# Altium PCB LCD_Controller.PcbDoc
Units mm, origin at the board's own origin, x right, y up, seen from the top; angles counter-clockwise.
Board outline 172.5 x 79.9 mm, 2 copper layers (Top Layer, Bottom Layer); 89 components, 123 nets, 382 pads, 379 vias.
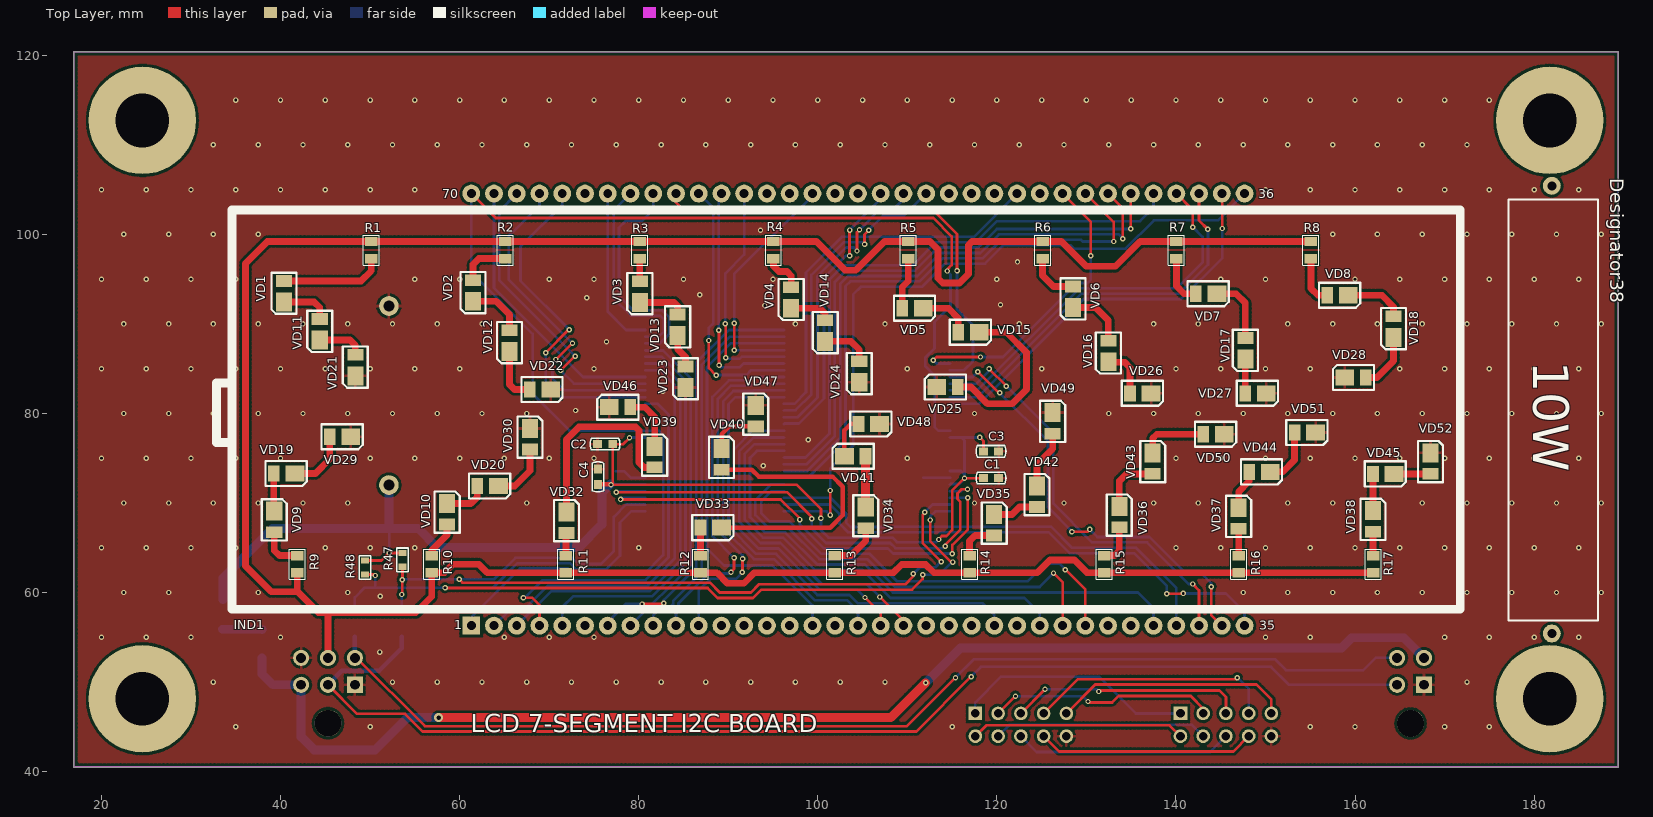
[diagram p0: Top Layer view]
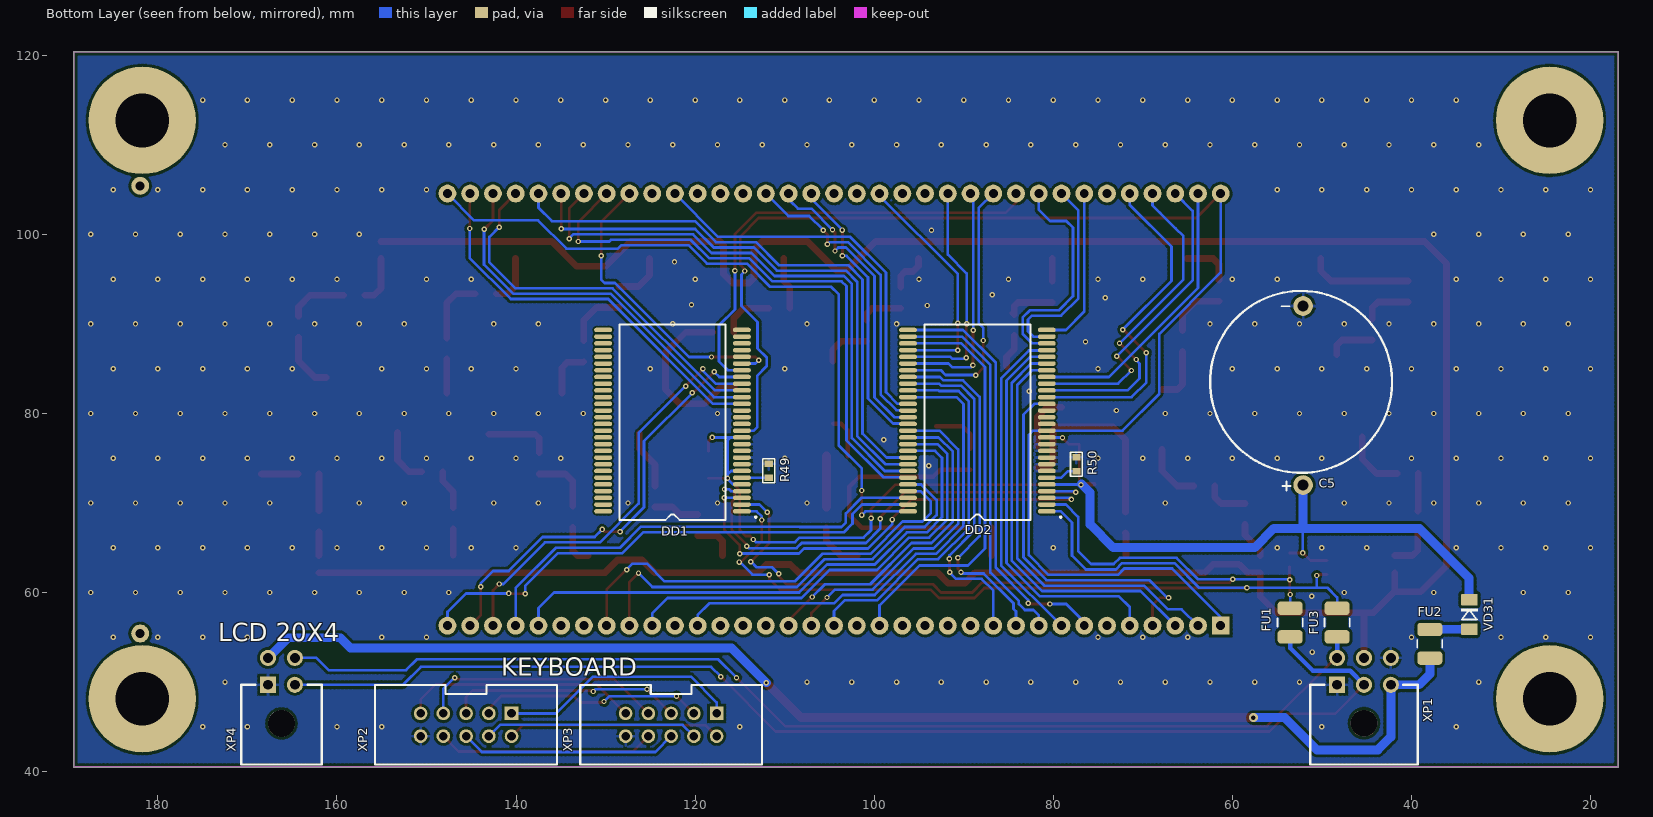
[diagram p1: Bottom Layer view, seen from below]

## Layer stack, top to bottom
Top Solder: solder mask 0.0102, Solder Resist, Dk 3.5
Top Layer: signal copper 0.0356
Dielectric 1: dielectric 0.32, FR-4, Dk 4.8
Bottom Layer: signal copper 0.0356
Bottom Solder: solder mask 0.0102, Solder Resist, Dk 3.5

## Board outline
16.9,40.5 189.4,40.5 189.4,120.4 16.9,120.4

## Design rules (kind name [scope] priority, off if disabled: settings)
Clearance Clearance_1 [InComponent('DD1') OR InComponent('DD2')] p1: gap=0.2
Clearance [All] p2: gap=0.3
PolygonConnect PolygonConnect_1 [IsVia OR InComponent('VT1')] p1: connectstyle=Direct reliefconductorwidth=0.254 reliefentries=4 polygonreliefangle="90 Angle" airgapwidth=0.254
PolygonConnect [All] p2: connectstyle=Relief reliefconductorwidth=0.3 reliefentries=4 polygonreliefangle="90 Angle" airgapwidth=0.3
RoutingVias [All] p1: holewidth=0.4 width=0.8 viastyle="Through Hole" minholewidth=0.3 minwidth=0.6 maxholewidth=0.5 maxwidth=1
SolderMaskExpansion [All] p1: expansion=0.102
Width [All] p1: maxlimit=5 minlimit=0.2 preferedwidth=0.5
30 further rules are at their usual default settings.

## Classes and differential pairs
component class Main: C1 C2 C3 C4 C5 DD1 DD2 FU1 FU2 FU3 R47 R48 R49 R50 VD31 XP1 XP2 XP3 XP4
component class LED_backlight: R1 R2 R3 R4 R5 R6 R7 R8 R9 R10 R11 R12 R13 R14 R15 R16 R17 VD1 VD2 VD3 VD4 VD5 VD6 VD7 VD8 VD9 VD10 VD11 VD12 VD13 VD14 VD15 VD16 VD17 VD18 VD19 VD20 VD21 VD22 VD23 VD24 VD25 VD26 VD27 VD28 VD29 VD30 VD32 VD33 VD34 VD35 VD36 VD37 VD38 VD39 VD40 VD41 VD42 VD43 VD44 VD45 VD46 VD47 VD48 VD49 VD50 VD51 VD52
component class LCD: IND1

## Components (designator, comment, footprint, x,y, rotation, side; value= is the part's Value field where it differs from the comment)
C1 "0.1uF" CC0603 119.35,72.775 r0 top
C2 "0.1uF" CC0603 76.25,76.575 r180 top
C3 "0.1uF" CC0603 119.35,75.775 r0 top
C4 "0.1uF" CC0603 75.45,72.925 r90 top
C5 "EEC-S5R5H105" CR2032_ONBOARD 52.45,83.425 r0 bottom
DD1 "PCF8576" SOT190-1 114.775,69.075 r0 bottom
DD2 "PCF8576" SOT190-1 80.725,69.075 r0 bottom
Designator38 "Comment" R_5W_Cement 181.975,105.425 r270 top
FU1 "MICROSMD010F-2" RC1210 53.55,56.65 r90 bottom
FU2 "MICROSMD010F-2" RC1210 37.95,54.275 r90 bottom
FU3 "MICROSMD010F-2" RC1210 48.3,56.65 r90 bottom
IND1 "DE156" IND_DE156 61.3,56.3 r90 top
R1 "82E" RC0805 50.125,98.25 r90 top
R2 "82E" RC0805 65.075,98.25 r90 top
R3 "82E" RC0805 80.1,98.25 r90 top
R4 "82E" RC0805 95.05,98.25 r90 top
R5 "82E" RC0805 110.1,98.25 r90 top
R6 "82E" RC0805 125.1,98.25 r90 top
R7 "82E" RC0805 140.05,98.25 r90 top
R8 "82E" RC0805 155.075,98.25 r90 top
R9 "82E" RC0805 41.875,63.175 r270 top
R10 "82E" RC0805 56.875,63.175 r270 top
R11 "82E" RC0805 71.875,63.175 r270 top
R12 "82E" RC0805 86.9,63.175 r270 top
R13 "82E" RC0805 101.9,63.175 r270 top
R14 "82E" RC0805 116.95,63.175 r270 top
R15 "82E" RC0805 131.975,63.175 r270 top
R16 "82E" RC0805 147,63.175 r270 top
R17 "82E" RC0805 162.025,63.175 r270 top
R47 "2k2" RC0603 53.625,63.65 r90 top
R48 "2k2" RC0603 49.425,62.8 r90 top
R49 "0E" RC0603 111.775,73.6 r270 bottom
R50 "0E" RC0603 77.425,74.325 r270 bottom
VD1 "LED_3528" 3528LED 40.375,93.8 r270 top
VD2 "LED_3528" 3528LED 61.5,93.875 r270 top
VD3 "LED_3528" 3528LED 80.125,93.75 r270 top
VD4 "LED_3528" 3528LED 97.025,93.1 r270 top
VD5 "LED_3528" 3528LED 110.425,91.75 r0 top
VD6 "LED_3528" 3528LED 128.5,93.175 r270 top
VD7 "LED_3528" 3528LED 143.225,93.375 r0 top
VD8 "LED_3528" 3528LED 157.9,93.2 r0 top
VD9 "LED_3528" 3528LED 39.3,67.75 r90 top
VD10 "LED_3528" 3528LED 58.6,68.6 r90 top
VD11 "LED_3528" 3528LED 44.375,89.55 r270 top
VD12 "LED_3528" 3528LED 65.575,88.275 r270 top
VD13 "LED_3528" 3528LED 84.35,90.05 r270 top
VD14 "LED_3528" 3528LED 100.825,89.4 r270 top
VD15 "LED_3528" 3528LED 116.675,89.075 r0 top
VD16 "LED_3528" 3528LED 132.45,87.125 r270 top
VD17 "LED_3528" 3528LED 147.75,87.425 r270 top
VD18 "LED_3528" 3528LED 164.3,89.85 r270 top
VD19 "LED_3528" 3528LED 40.25,73.3 r0 top
VD20 "LED_3528" 3528LED 62.975,71.9 r0 top
VD21 "LED_3528" 3528LED 48.35,85.55 r270 top
VD22 "LED_3528" 3528LED 68.825,82.675 r0 top
VD23 "LED_3528" 3528LED 85.225,84.25 r270 top
VD24 "LED_3528" 3528LED 104.625,84.825 r270 top
VD25 "LED_3528" 3528LED 114.625,82.95 r180 top
VD26 "LED_3528" 3528LED 135.875,82.25 r0 top
VD27 "LED_3528" 3528LED 148.725,82.25 r0 top
VD28 "LED_3528" 3528LED 160.2,84.025 r180 top
VD29 "LED_3528" 3528LED 46.5,77.4 r0 top
VD30 "LED_3528" 3528LED 67.85,76.975 r90 top
VD31 "LL4148" SOD-80 33.525,57.55 r270 bottom
VD32 "LED_3528" 3528LED 71.925,67.65 r90 top
VD33 "LED_3528" 3528LED 87.9,67.25 r0 top
VD34 "LED_3528" 3528LED 105.35,68.2 r90 top
VD35 "LED_3528" 3528LED 119.7,67.375 r90 top
VD36 "LED_3528" 3528LED 133.675,68.275 r90 top
VD37 "LED_3528" 3528LED 147,68.125 r90 top
VD38 "LED_3528" 3528LED 162,67.8 r90 top
VD39 "LED_3528" 3528LED 81.775,74.975 r90 top
VD40 "LED_3528" 3528LED 89.25,74.725 r90 top
VD41 "LED_3528" 3528LED 104.325,75.225 r180 top
VD42 "LED_3528" 3528LED 124.475,70.55 r90 top
VD43 "LED_3528" 3528LED 137.4,74.25 r90 top
VD44 "LED_3528" 3528LED 149.175,73.475 r0 top
VD45 "LED_3528" 3528LED 163,73.25 r0 top
VD46 "LED_3528" 3528LED 78.05,80.7 r180 top
VD47 "LED_3528" 3528LED 93.075,79.55 r90 top
VD48 "LED_3528" 3528LED 105.55,78.825 r0 top
VD49 "LED_3528" 3528LED 126.225,78.75 r90 top
VD50 "LED_3528" 3528LED 144.05,77.675 r0 top
VD51 "LED_3528" 3528LED 154.25,77.875 r0 top
VD52 "LED_3528" 3528LED 168.425,74.25 r90 top
XP1 "MIF2X03PRP" MIF2X03PRP 48.3,49.7 r270 bottom
XP2 "n.p" BH-10 140.5,46.5 r0 bottom
XP3 "n.p" BH-10 117.6,46.5 r0 bottom
XP4 "n.p" MIF2X02PRP 167.7,49.7 r270 bottom

## Footprints (in the part's own frame and the unit in brackets; to place one, negate y for a bottom-side part, rotate by r counter-clockwise, add the part's x,y. Pads: shape width x height; smd on the part's side, far side on the other; paste and mask are expansions set on the pad)
3528LED [mm]
  rect 1.3x1.8 smd: 1(-1,0)
  rect 2.1x1.8 smd: 2(1.35,0)
  silkscreen extent -1.92,-1.4 2.68,1.4
BH-10 [mil]
  rect 60x60 hole 38: 1(0,0)
  round 60 hole 38: 2(0,100) 3(100,0) 4(100,100) 5(200,0) 6(200,100) 7(300,0) 8(300,100) 9(400,0) 10(400,100)
  silkscreen extent -200,-125 600,225
CC0603 [mm]
  rect 1x0.9 smd paste-25.4: 1(-0.85,0) 2(0.85,0)
  silkscreen extent -1.66,-0.65 1.66,0.65
CR2032_ONBOARD [mm]
  round 2.2 hole 1.2: 1(-0.35,-8.575) 2(-0.35,11.425)
  silkscreen extent -10.28,-10.26 10.03,12.02
IND_DE156 [mm]
  rect 2x2 hole 1: 1(0,0)
  round 2 hole 1: 2(0,-2.54) 3(0,-5.08) 4(0,-7.62) 5(0,-10.16) 6(0,-12.7) 7(0,-15.24) 8(0,-17.78) 9(0,-20.32) 10(0,-22.86) 11(0,-25.4) 12(0,-27.94) 13(0,-30.48) 14(0,-33.02) 15(0,-35.56) 16(0,-38.1) 17(0,-40.64) 18(0,-43.18) 19(0,-45.72) 20(0,-48.26) 21(0,-50.8) 22(0,-53.34) 23(0,-55.88) 24(0,-58.42) 25(0,-60.96) 26(0,-63.5) 27(0,-66.04) 28(0,-68.58) 29(0,-71.12) 30(0,-73.66) 31(0,-76.2) 32(0,-78.74) 33(0,-81.28) 34(0,-83.82) 35(0,-86.36) 36(48.26,-86.36) 37(48.26,-83.82) 38(48.26,-81.28) 39(48.26,-78.74) 40(48.26,-76.2) 41(48.26,-73.66) 42(48.26,-71.12) 43(48.26,-68.58) 44(48.26,-66.04) 45(48.26,-63.5) 46(48.26,-60.96) 47(48.26,-58.42) 48(48.26,-55.88) 49(48.26,-53.34) 50(48.26,-50.8) 51(48.26,-48.26) 52(48.26,-45.72) 53(48.26,-43.18) 54(48.26,-40.64) 55(48.26,-38.1) 56(48.26,-35.56) 57(48.26,-33.02) 58(48.26,-30.48) 59(48.26,-27.94) 60(48.26,-25.4) 61(48.26,-22.86) 62(48.26,-20.32) 63(48.26,-17.78) 64(48.26,-15.24) 65(48.26,-12.7) 66(48.26,-10.16) 67(48.26,-7.62) 68(48.26,-5.08) 69(48.26,-2.54) 70(48.26,0)
  silkscreen extent 1.84,-110.45 46.42,28.45
MIF2X02PRP [mm]
  rect 1.8x1.8 hole 1.1: 1(0,0)
  round 1.8 hole 1.1: 2(0,3) 3(-3,0) 4(-3,3)
  round 3 hole 3 unplated: 5(4.32,1.5)
  silkscreen extent 0,-3 8.9,6
MIF2X03PRP [mm]
  rect 1.8x1.8 hole 1.1: 1(0,0)
  round 1.8 hole 1.1: 2(0,3) 3(0,6) 4(-3,0) 5(-3,3) 6(-3,6)
  round 3 hole 3 unplated: 7(4.3,3)
  silkscreen extent 0,-3 8.9,9
R_5W_Cement [mm]
  round 2 hole 1: 1(0,0) 2(50,0)
  silkscreen extent 1.53,-4.85 48.55,5.15
RC0603 [mm]
  rect 0.7x0.9 smd paste-25.4: 1(-0.775,0) 2(0.774,0)
  silkscreen extent -1.32,-0.65 1.33,0.65
RC0805 [mm]
  rect 1.05x1.4 smd paste-25.4: 1(-0.95,0) 2(0.95,0)
  silkscreen extent -1.67,-0.89 1.67,0.89
RC1210 [mm]
  rrect50% 1.5x2.8 smd: 1(-1.6,0) 2(1.6,0)
  silkscreen extent -0.45,-1.4 0.45,1.4
SOD-80 [mm]
  rrect10% 1.3x1.83 smd paste-25.4: 1(1.651,0) 2(-1.651,0)
  silkscreen extent -0.66,-0.91 0.56,0.91
SOT190-1 [mm]
  oval 2x0.5 smd: 1(0,0) 2(0,-0.75) 3(0,-1.5) 4(0,-2.25) 5(0,-3) 6(0,-3.75) 7(0,-4.5) 8(0,-5.25) 9(0,-6) 10(0,-6.75) 11(0,-7.5) 12(0,-8.25) 13(0,-9) 14(0,-9.75) 15(0,-10.5) 16(0,-11.25) 17(0,-12) 18(0,-12.75) 19(0,-13.5) 20(0,-14.25) 21(0,-15) 22(0,-15.75) 23(0,-16.5) 24(0,-17.25) 25(0,-18) 26(0,-18.75) 27(0,-19.5) 28(0,-20.25) 29(15.5,-20.25) 30(15.5,-19.5) 31(15.5,-18.75) 32(15.5,-18) 33(15.5,-17.25) 34(15.5,-16.5) 35(15.5,-15.75) 36(15.5,-15) 37(15.5,-14.25) 38(15.5,-13.5) 39(15.5,-12.75) 40(15.5,-12) 41(15.5,-11.25) 42(15.5,-10.5) 43(15.5,-9.75) 44(15.5,-9) 45(15.5,-8.25) 46(15.5,-7.5) 47(15.5,-6.75) 48(15.5,-6) 49(15.5,-5.25) 50(15.5,-4.5) 51(15.5,-3.75) 52(15.5,-3) 53(15.5,-2.25) 54(15.5,-1.5) 55(15.5,-0.75) 56(15.5,0)
  silkscreen extent -1.64,-20.85 13.66,0.97

## Part data
C1 C2 C3 C4: library part CC0603, "CC0603"
C5: library part CR2032-VBY2
DD1 DD2: "LCD Controller"
FU1 FU2 FU3: library part MICROSMD, "MICROSMD"
IND1: library part IND7_DE156, "6digit 7Segment indicator"
R1 R2 R3 R4 R5 R6 R7 R8 R9 R10 R11 R12 R13 R14 R15 R16 R17: library part RC0805, "RC0805"
R47 R48 R49 R50: library part RC0603, "RC0603"
VD1 VD2 VD3 VD4 VD5 VD6 VD7 VD8 VD9 VD10 VD11 VD12 VD13 VD14 VD15 VD16 VD17 VD18 VD19 VD20 VD21 VD22 VD23 VD24 VD25 VD26 VD27 VD28 VD29 VD30 VD32 VD33 VD34 VD35 VD36 VD37 VD38 VD39 VD40 VD41 VD42 VD43 VD44 VD45 VD46 VD47 VD48 VD49 VD50 VD51 VD52: library part 3528LED
XP2 XP3: library part BH-10, "BH-10"
XP4: library part MIF2X02PRP, "MIF2X02PRP"

## Free pads (board coordinates)
  round 12 hole 6 unplated: 0(24.565,48.135) 0(24.565,112.725) 0(181.75,48.135) 0(181.75,112.725)

## Via types
v1: diameter 0.6, hole 0.3, Top Layer to Bottom Layer, 378 vias
v2: diameter 1, hole 0.5, Top Layer to Bottom Layer, 1 vias

## Nets (pads, with @x,y where several pads share a name; then routed paths per layer and width w, separated by ;. In a path a pad name is that pad's centre, name@x,y a point inside that pad or via, vN(x,y) a via of type N, cw(c..) or ccw(c..) an arc to the next point about the centre after c; other vN are vias at no path point)
1A: DD2.19 IND1.67 | length 36.9
  Top Layer w0.3: v1(70.75,86.025) 72.55,87.825 v1(72.6,87.825)
  Bottom Layer w0.3: IND1.67 68.92,103.245 68.059,102.384 66.336,100.661 65.475,99.8 65.475,94.95 v1(72.6,87.825) ; v1(70.75,86.025) 70.75,85.95 70.375,85.575 70.375,83.925 71.725,82.575 DD2.19
1B: DD2.18 IND1.66 | length 38.2
  Top Layer w0.3: v1(69.6,86.775) 72.175,89.35 v1(72.25,89.35)
  Bottom Layer w0.3: v1(69.6,86.775) 69.6,83.475 71.25,81.825 DD2.18 ; IND1.66 71.46,103.285 66.8,98.625 66.8,94.8 v1(72.25,89.35)
1C: DD2.17 IND1.4 | length 41.5
  Top Layer w0.3: v1(67.125,59.425) 68.1,59.425 68.92,58.605 IND1.4
  Bottom Layer w0.3: v1(67.125,59.425) 67.325,59.425 69.283,61.383 80.769,61.383 83.325,63.939 83.325,79.875 82.125,81.075 DD2.17
1D: DD2.23 IND1.3 | length 45.9
  Bottom Layer w0.3: IND1.3 70.255,60.175 81.258,60.175 84.625,63.542 84.625,83.428 82.478,85.575 DD2.23
1E: DD2.22 IND1.2 | length 46.7
  Bottom Layer w0.3: IND1.2 65.665,58.125 67.2,58.125 69.85,60.775 81.009,60.775 84.025,63.791 84.025,83.179 82.379,84.825 DD2.22
1F: DD2.20 IND1.68 | length 34.9
  Top Layer w0.3: v1(71.275,84.8) 72.85,86.375 v1(72.925,86.375)
  Bottom Layer w0.3: IND1.68 64.44,102.62 64.44,94.86 v1(72.925,86.375) ; v1(71.275,84.8) 72.75,83.325 DD2.20
1G: DD2.21 IND1.69 | length 31.5
  Bottom Layer w0.3: IND1.69 63.84,94.035 73.8,84.075 DD2.21
2A: DD2.27 IND1.63 | length 22.7
  Bottom Layer w0.3: IND1.63 77.2,102.68 77.2,92.85 79.125,90.925 82.375,90.925 82.825,90.475 82.825,89.175 82.225,88.575 DD2.27
2B: DD2.26 IND1.62 | length 25.7
  Bottom Layer w0.3: DD2.26 82.35,87.825 83.425,88.9 83.425,90.724 82.624,91.525 79.374,91.525 77.8,93.099 77.8,100.75 78.55,101.5 80.375,101.5 81.62,102.745 IND1.62
2C: DD2.25 IND1.8 | length 36.8
  Bottom Layer w0.3: IND1.8 85.825,63.045 85.825,83.925 82.725,87.025 80.775,87.025 DD2.25
2D: DD2.29 IND1.7 | length 47.2
  Top Layer w0.3: v1(80.375,58.725) 82.725,58.725 v1(82.8,58.8)
  Bottom Layer w0.3: IND1.7 76.54,56.715 78.55,58.725 v1(80.375,58.725) ; v1(82.8,58.8) 82.8,59.171 86.425,62.796 86.425,85.675 90.075,89.325 DD2.29
2E: IND1.6
2F: DD2.28 IND1.64 | length 18.2
  Bottom Layer w0.3: IND1.64 76.54,91.385 78.6,89.325 DD2.28
2G: IND1.65
3A: DD2.33 IND1.58 | length 25.9
  Top Layer w0.3: v1(89.679,90.029) 89.729,89.979 v1(89.729,86.204)
  Bottom Layer w0.3: v1(89.679,90.029) 89.679,95.629 91.78,97.73 IND1.58 ; v1(89.729,86.204) 89.809,86.125 91.3,86.125 91.5,86.325 DD2.33
3B: DD2.32 IND1.55 | length 26.7
  Top Layer w0.3: v1(90.654,87.054) v1(90.654,90.079)
  Bottom Layer w0.3: v1(90.654,87.054) 90.675,87.075 DD2.32 ; v1(90.654,90.079) 90.654,95.554 99.4,104.3 IND1.55
3C: DD2.31 IND1.16 | length 46.6
  Bottom Layer w0.3: DD2.31 90.272,87.825 87.625,85.178 87.625,64.925 89.525,63.025 94.95,63.025 99.4,58.575 IND1.16
3D: DD2.37 IND1.11 | length 38.3
  Top Layer w0.3: v1(91.575,62.25) 91.6,62.275 v1(91.6,63.775)
  Bottom Layer w0.3: IND1.11 86.7,60.203 88.022,61.525 90.85,61.525 v1(91.575,62.25) ; v1(91.6,63.775) 91.6,64.15 88.825,66.925 88.825,81.601 90.324,83.1 92.522,83.1 92.747,83.325 DD2.37
3E: DD2.36 IND1.10 | length 39.6
  Top Layer w0.3: v1(90.3,62.275) 90.65,62.625 v1(90.65,63.875)
  Bottom Layer w0.3: IND1.10 84.16,57.896 84.45,58.186 84.45,58.801 87.774,62.125 90.15,62.125 v1(90.3,62.275) ; v1(90.65,63.875) 88.225,66.3 88.225,81.85 90.075,83.7 92.274,83.7 92.649,84.075 DD2.36
3F: DD2.34 IND1.59 | length 26.9
  Top Layer w0.3: v1(88.954,89.304) 88.975,89.284 v1(88.975,85.375)
  Bottom Layer w0.3: v1(88.954,89.304) 88.929,89.329 88.929,104.249 IND1.59 ; v1(88.975,85.375) 89.2,85.15 91.275,85.15 91.7,85.575 DD2.34
3G: DD2.35 IND1.60 | length 29.3
  Top Layer w0.3: v1(87.829,88.154) 87.829,85.071 v1(88.65,84.25)
  Bottom Layer w0.3: IND1.60 88.329,102.931 88.329,90.075 87.829,89.575 v1(87.829,88.154) ; v1(88.65,84.25) 88.7,84.3 92.025,84.3 92.55,84.825 DD2.35
4A: DD2.41 IND1.50 | length 34.6
  Top Layer w0.3: v1(105.225,98.9) 105.225,99.975 105.686,100.436 v1(105.686,100.475)
  Bottom Layer w0.3: DD2.41 96.275,80.375 97.524,80.375 99.275,82.126 99.275,95.476 102.924,99.125 105,99.125 v1(105.225,98.9) ; v1(105.686,100.475) 107.261,102.05 109.59,102.05 IND1.50
4B: DD2.40 IND1.46 | length 43.6
  Bottom Layer w0.3: DD2.40 97.375,81.075 98.675,82.375 98.675,95.725 102.675,99.725 117.425,99.725 IND1.46
4C: DD2.39 IND1.24 | length 55.2
  Bottom Layer w0.3: DD2.39 90.8,81.825 90.025,81.05 90.025,67.422 93.122,64.325 95.347,64.325 99.947,59.725 103.549,59.725 104.474,58.8 118.42,58.8 119.72,57.5 IND1.24
4D: DD2.45 IND1.20 | length 36.9
  Top Layer w0.3: v1(106.925,59.5) 109.56,56.865 IND1.20
  Bottom Layer w0.3: DD2.45 92.824,77.325 91.225,75.726 91.225,67.919 93.619,65.525 95.844,65.525 100.444,60.925 105.5,60.925 v1(106.925,59.5)
4E: DD2.44 IND1.19 | length 36.7
  Top Layer w0.3: v1(105.275,59.45) 107.02,57.705 IND1.19
  Bottom Layer w0.3: DD2.44 92.725,78.075 90.625,75.975 90.625,67.671 93.371,64.925 95.596,64.925 100.196,60.325 104.4,60.325 v1(105.275,59.45)
4F: DD2.42 IND1.51 | length 32.9
  Top Layer w0.3: v1(104.375,98.15) 104.375,100.225 v1(104.655,100.505)
  Bottom Layer w0.3: DD2.42 97.75,79.575 99.975,81.8 99.975,95.328 103.172,98.525 104,98.525 v1(104.375,98.15) ; v1(104.655,100.505) 107.025,102.875 108.525,102.875 109.405,103.755 IND1.51@109.405,104.025
4G: DD2.43 IND1.52 | length 31.7
  Top Layer w0.3: v1(103.55,97.625) 103.55,100.475 v1(103.555,100.48)
  Bottom Layer w0.3: DD2.43 96.275,78.875 97.899,78.875 100.7,81.676 100.7,95.204 103.096,97.6 103.525,97.6 v1(103.55,97.625) ; v1(103.555,100.48) 107.02,103.945 IND1.52 IND1.52@107.205,104.375
5A: DD2.49 IND1.41 | length 63.6
  Top Layer w0.3: v1(134.95,100.625) 134.95,104.55 IND1.41
  Bottom Layer w0.3: DD2.49 98.724,74.325 101.9,77.501 101.9,94.707 103.143,95.95 110.874,95.95 113.449,98.525 117.922,98.525 119.997,100.6 v1@134.875,100.6
5B: DD2.48 IND1.40 | length 64.5
  Bottom Layer w0.3: DD2.48 98.625,75.075 101.3,77.75 101.3,94.956 102.894,96.55 110.625,96.55 113.2,99.125 117.674,99.125 120.024,101.475 136,101.475 137.5,102.975 IND1.40
5C: DD2.47 IND1.31 | length 62
  Bottom Layer w0.3: DD2.47 93.2,75.825 92.425,75.05 92.425,68.416 94.116,66.725 96.341,66.725 99.941,63.125 105.25,63.125 108.375,60 135.75,60 137.5,58.25 IND1.31
5D: DD2.53 IND1.28 | length 49.7
  Top Layer w0.3: v1(127.65,62.55) 129.88,60.32 IND1.28
  Bottom Layer w0.3: DD2.53 94.849,71.325 93.674,70.151 93.674,68.864 94.613,67.925 96.838,67.925 100.438,64.325 105.8,64.325 108.875,61.25 123.4,61.25 125.375,63.225 126.975,63.225 v1(127.65,62.55)
5E: DD2.52 IND1.27 | length 49.2
  Top Layer w0.3: v1(126.325,62.175) 127.34,61.16 IND1.27
  Bottom Layer w0.3: DD2.52 94.75,72.075 93.025,70.35 93.025,68.665 94.365,67.325 96.59,67.325 100.19,63.725 105.525,63.725 108.625,60.625 124.775,60.625 v1(126.325,62.175)
5F: DD2.50 IND1.42 | length 64.7
  Top Layer w0.3: IND1.42 134.05,102.93 v1(134.05,99.525)
  Bottom Layer w0.3: DD2.50 98.822,73.575 102.5,77.253 102.5,94.459 103.391,95.35 111.122,95.35 113.697,97.925 118.171,97.925 120.246,100 133.625,100 v1@134.05,99.575
5G: DD2.51 IND1.43 | length 64.7
  Top Layer w0.3: IND1.43 133.05,101.39 v1(133.05,99.2)
  Bottom Layer w0.3: DD2.51 96.275,72.875 98.971,72.875 103.1,77.004 103.1,94.21 103.64,94.75 111.371,94.75 113.946,97.325 118.419,97.325 120.494,99.4 129.375,99.4 129.575,99.2 v1(133.05,99.2)
6A: DD1.17 IND1.37 | length 44.4
  Top Layer w0.3: IND1.37 145.175,104.505 v1(145.175,100.65)
  Bottom Layer w0.3: DD1.17 118,81.075 129.7,92.775 140.575,92.775 145.175,97.375 v1(145.175,100.65)
6B: DD2.56 IND1.36 | length 79.8
  Top Layer w0.3: v1(101.375,71.4) 101.375,68.675 v1(101.4,68.65)
  Bottom Layer w0.3: DD2.56 100.975,69.075 v1(101.4,68.65) ; v1(101.375,71.4) 101.375,73.85 103.975,76.45 103.975,93.325 104.8,94.15 111.619,94.15 114.194,96.725 118.668,96.725 120.743,98.8 128.225,98.8 128.625,98.4 134.375,98.4 137.55,101.575 144.675,101.575 IND1.36
6C: DD2.55 IND1.35 | length 59.1
  Top Layer w0.3: v1(138.975,59.875) 140.779,59.875 v1(140.807,59.903)
  Bottom Layer w0.3: DD2.55 101.35,69.825 102.425,68.75 102.425,67.7 103.4,66.725 108.59,66.725 108.615,66.75 125.776,66.75 128.126,64.4 135.301,64.4 138.975,60.726 v1(138.975,59.875) ; v1(140.807,59.903) 145.597,59.903 147.66,57.84 IND1.35
6D: DD1.21 IND1.34 | length 49.1
  Top Layer w0.3: v1(117.875,84.65) 120.221,82.304 v1(120.306,82.304) ; v1(128.381,66.778) 130.103,66.778 v1(130.375,67.05) ; v1(143.932,60.653) 143.932,57.488 IND1.34
  Bottom Layer w0.3: DD1.21 117.3,84.075 v1(117.875,84.65) ; v1(120.306,82.304) 125.7,76.91 125.7,69.525 128.447,66.778 v1(128.381,66.778) ; v1(130.375,67.05) 131.225,66.2 137.024,66.2 140.824,62.4 142.575,62.4 143.925,61.05 143.925,60.66 v1(143.932,60.653)
6E: DD1.20 IND1.33 | length 47.4
  Top Layer w0.3: v1(119.131,84.979) v1(121.056,83.054) ; v1(141.875,60.95) 142.58,60.245 IND1.33
  Bottom Layer w0.3: DD1.20 117.704,83.325 119.131,84.751 v1(119.131,84.979) ; v1(121.056,83.054) 126.3,77.81 126.3,69.925 130.625,65.6 136.775,65.6 141.425,60.95 v1(141.875,60.95)
6F: DD1.18 IND1.38 | length 43.3
  Top Layer w0.3: IND1.38 142.58,101.545 v1(143.55,100.575)
  Bottom Layer w0.3: DD1.18 117.901,81.825 129.451,93.375 140.326,93.375 143.576,96.624 143.576,100.549 v1(143.55,100.575)
6G: DD1.19 IND1.39 | length 43
  Top Layer w0.3: IND1.39 141.875,102.725 v1(141.875,100.8)
  Bottom Layer w0.3: DD1.19 117.803,82.575 129.203,93.975 140.078,93.975 142.976,96.873 142.976,99.699 v1(141.875,100.8)
+5V: C1.1 C2.1 C3.1 C4.1 C5.2 DD1.5 DD1.7 DD1.12 DD2.5 DD2.12 R47.2 R48.2 VD31.2 | length 144.4
  Top Layer w0.3: R48.2 51.274,63.574 v1(52.124,64.424) R47.2 ; v1@76.875,72.075 77.1,72.3 C2.1 78.275,76.575 v1@78.95,77.25 ; v1(76.9,72.05) 97.625,72.05 100.35,69.325 v1(100.35,68.3) ; v1(113.5,65.925) 113.5,65.975 113.849,66.324 114.351,66.324 115,66.972 115,71.398 v1(116.381,72.779) C1.1@118.496,72.779 ; v1(118.075,77.325) 118.5,76.9 C3.1
  Top Layer w0.5: C4.1 v1@76.875,72.075
  Bottom Layer w0.3: v1(52.124,64.424) 52.124,67.174 ; v1(76.9,72.05) 76.925,72.075 DD2.5 ; v1(78.975,77.275) 79.025,77.325 DD2.12 ; v1(100.35,68.3) 100.35,66.959 101.184,66.125 108.341,66.125 108.841,65.625 113.2,65.625 v1(113.5,65.925) ; DD1.5 114.825,72.125 115.815,72.125 116.381,72.691 v1(116.381,72.779) 116.381,73.194 ; DD1.7 116,73.575 116.381,73.194 ; DD1.12 116.025,77.325 ; v1(118.075,77.325) 116.025,77.325 ; 116.025,77.325 116.381,76.969 116.381,73.194
  Bottom Layer w1: VD31.2@33.55,59.201 33.55,61.6 39.125,67.175 55.375,67.175 57.525,65.025 73.3,65.025 75.875,67.6 75.875,71.155 v1@76.835,72.115 ; 52.1,67.199 C5.2
BL: R1.2 R2.2 R3.2 R4.2 R5.2 R6.2 R7.2 R8.2 R9.2 R10.2 R11.2 R12.2 R13.2 R14.2 R15.2 R16.2 R17.2 XP1.5 | length 308.8
  Top Layer w0.75: R9.2 41.875,60.1 ; XP1.5 45.3,57.625 45.425,57.75 ; R8.2 R7.2 136,99.2 133.225,96.425 130,96.425 127.225,99.2 R6.2 117.225,99.2 116.825,98.8 116.825,95.575 115.825,94.575 113.95,94.575 113.425,95.1 113.425,98.3 112.525,99.2 R5.2 107.45,99.2 104.25,96 103.05,96 99.85,99.2 R4.2 R3.2 R2.2 R1.2 38.525,99.2 36.075,96.75 36.075,62.975 38.95,60.1 41.875,60.1 ; R17.2 R16.2 R15.2 130.075,62.225 128.675,63.625 125.925,63.625 124.525,62.225 R14.2 112.95,62.225 112.05,63.125 109.375,63.125 108.475,62.225 R13.2 92.929,62.225 91.729,61.025 89.925,61.025 88.725,62.225 R12.2 R11.2 63.075,62.225 62.125,63.175 59.275,63.175 58.325,62.225 R10.2 56.875,59.525 55.1,57.75 45.425,57.75 ; 41.875,60.1 44.225,57.75 45.425,57.75
BP: DD1.13 DD2.13 IND1.1 IND1.70 | length 161.7
  Top Layer w0.3: IND1.70 64.035,101.825 112.901,101.825 114.956,99.771 114.956,96.565 114.456,96.065 v1(114.456,95.905)
  Bottom Layer w0.3: IND1.1 61.3,57.25 66.725,62.675 72.075,62.675 72.767,61.983 80.52,61.983 82.725,64.188 82.725,77.6 82.25,78.075 DD2.13 72.275,78.075 68.15,82.2 68.15,88.876 61.3,95.726 IND1.70 ; v1(114.456,95.905) 114.456,95.894 114.825,95.525 114.825,92 113.025,90.2 113.025,87.275 112,86.25 112,85.275 113.075,84.2 113.075,78.45 113.45,78.075 DD1.13
COL1: DD1.22 IND1.61 | length 51.8
  Top Layer w0.3: IND1.61 84.16,103.565 85.3,102.425 113.15,102.425 115.556,100.019 v1(115.556,95.955)
  Bottom Layer w0.3: DD1.22 116.35,84.825 117.325,85.8 117.325,89.85 115.556,91.619 v1(115.556,95.955)
COL2: DD1.23 IND1.44 | length 34.3
  Top Layer w0.3: v1(112.9,85.925) 113.275,86.3 v1(118.175,86.3) ; IND1.44 130.5,101.4 v1(130.5,97.6)
  Bottom Layer w0.3: v1(112.9,85.925) 113.25,85.575 DD1.23 ; v1(118.175,86.3) 120.679,86.3 128.954,94.575 130.125,94.575 130.5,94.95 v1(130.5,97.6)
DP: DD2.24 IND1.5 | length 43.8
  Bottom Layer w0.3: IND1.5 71.46,58.36 72.675,59.575 81.506,59.575 85.225,63.294 85.225,83.676 82.576,86.325 DD2.24
DP2: DD2.30 IND1.9 | length 42.4
  Bottom Layer w0.3: IND1.9 81.62,57.445 82.225,58.05 83.175,58.05 83.85,58.725 83.85,59.05 87.025,62.225 87.025,85.426 90.174,88.575 DD2.30
DP3: DD2.38 IND1.18 | length 42
  Bottom Layer w0.3: DD2.38 92.846,82.575 92.771,82.5 90.572,82.5 89.425,81.353 89.425,67.174 92.874,63.725 95.099,63.725 99.699,59.125 103.3,59.125 104.48,57.945 IND1.18
DP4: DD2.46 IND1.26 | length 50.9
  Bottom Layer w0.3: DD2.46 92.922,76.575 91.825,75.478 91.825,68.168 93.868,66.125 96.093,66.125 99.696,62.521 102.598,62.521 102.601,62.525 105.001,62.525 108.126,59.4 123.075,59.4 124.8,57.675 IND1.26
DP5: DD2.54 IND1.32 | length 52.8
  Bottom Layer w0.3: DD2.54 101.449,70.575 103.174,68.849 103.174,67.799 103.649,67.325 108.341,67.325 108.366,67.35 126.025,67.35 128.375,65 135.55,65 140.04,60.51 IND1.32
GND: C1.2 C2.2 C3.2 C4.2 C5.1 DD1.8 DD1.9 DD1.10 DD1.11 DD2.7 DD2.8 DD2.9 DD2.10 DD2.11 R49.1 R50.1 VD21.2 VD22.2 VD23.2 VD24.2 VD25.2 VD26.2 VD27.2 VD28.2 VD29.2 VD30.2 VD46.2 VD47.2 VD48.2 VD49.2 VD50.2 VD51.2 VD52.2 XP1.1 XP1.6 XP2.10 XP3.10 XP4.1
  other v1: 35,45 50,45 115,45 155,45 160,45 170,45 175,45 32.5,50 52.5,50 57.5,50 62.5,50 67.5,50 72.5,50 77.5,50 82.5,50 87.5,50 92.5,50 97.5,50 102.5,50 107.5,50 172.5,50 51.075,53.35 20,55 25,55 30,55 40,55 65,55 70,55 75,55 150,55 155,55 170,55 175,55 180,55 185,55 51.125,59.6 22.5,60 27.5,60 37.5,60 47.5,60 147.5,60 152.5,60 157.5,60 162.5,60 167.5,60 172.5,60 177.5,60 182.5,60 187.5,60 20,65 25,65 30,65 35,65 45,65 50,65 55,65 80,65 140,65 145,65 150,65 155,65 160,65 165,65 170,65 175,65 180,65 185,65 22.5,70 27.5,70 32.5,70 37.5,70 42.5,70 47.5,70 67.5,70 107.5,70 117.5,70 127.5,70 137.5,70 142.5,70 152.5,70 157.5,70 167.5,70 172.5,70 177.5,70 182.5,70 187.5,70 93.9,74.15 20,75 25,75 30,75 35,75 40,75 50,75 55,75 60,75 65,75 70,75 75,75 110,75 135,75 140,75 145,75 150,75 155,75 160,75 165,75 170,75 175,75 180,75 185,75 98.95,77.075 22.5,80 27.5,80 32.5,80 37.5,80 42.5,80 47.5,80 52.5,80 57.5,80 62.5,80 67.5,80 117.5,80 132.5,80 137.5,80 142.5,80 147.5,80 152.5,80 157.5,80 162.5,80 167.5,80 172.5,80 177.5,80 182.5,80 187.5,80 72.95,80.325 82.675,82.475 20,85 25,85 30,85 35,85 40,85 45,85 50,85 55,85 60,85 75,85 110,85 125,85 140,85 145,85 150,85 155,85 165,85 170,85 175,85 180,85 185,85 76.4,88.025 22.5,90 27.5,90 32.5,90 37.5,90 42.5,90 47.5,90 52.5,90 57.5,90 62.5,90 97.5,90 107.5,90 122.5,90 137.5,90 142.5,90 152.5,90 157.5,90 162.5,90 167.5,90 172.5,90 177.5,90 182.5,90 187.5,90 94.075,92.05 120.4,92.15 74.2,92.925 86.825,93.275 20,95 25,95 30,95 35,95 55,95 60,95 70,95 75,95 85,95 95,95 120,95 145,95 150,95 160,95 165,95 170,95 175,95 180,95 185,95 122.3,96.925 22.5,100 27.5,100 32.5,100 37.5,100 157.5,100 162.5,100 167.5,100 172.5,100 177.5,100 182.5,100 187.5,100 93.6,100.45 20,105 25,105 30,105 35,105 40,105 45,105 50,105 55,105 150,105 155,105 160,105 165,105 170,105 175,105 180,105 185,105 32.5,110 37.5,110 42.5,110 47.5,110 52.5,110 57.5,110 62.5,110 67.5,110 72.5,110 77.5,110 82.5,110 87.5,110 92.5,110 97.5,110 102.5,110 107.5,110 112.5,110 117.5,110 122.5,110 127.5,110 132.5,110 137.5,110 142.5,110 147.5,110 152.5,110 157.5,110 162.5,110 167.5,110 172.5,110 35,115 40,115 45,115 50,115 55,115 60,115 65,115 70,115 75,115 80,115 85,115 90,115 95,115 100,115 105,115 110,115 115,115 120,115 125,115 130,115 135,115 140,115 145,115 150,115 155,115 160,115 165,115 170,115 175,115
NetDD1_1: DD1.1 DD2.1 FU3.2 R48.1 | length 110.8
  Top Layer w0.3: R48.1 50.45,62.025 v1(50.575,61.9) ; v1(58.375,60.525) 58.4,60.5 87.701,60.5 88.801,59.4 92.774,59.4 93.699,60.325 110.525,60.325 111.705,61.505 v1(111.705,62.003) ; v1(112.555,68.103) 112.55,68.098 112.55,65.739 114.886,63.403 v1(115.081,63.403)
  Bottom Layer w0.3: FU3.2 48.3,59.45 49.387,60.537 50.575,60.537 ; v1(50.575,61.9) 50.575,60.537 ; DD2.1 79.15,69.075 77.9,67.825 77.9,64.125 76.358,62.583 73.016,62.583 72.324,63.275 66.476,63.275 63.738,60.537 50.575,60.537 ; v1(111.705,62.003) 113.603,62.003 115.003,63.403 v1(115.081,63.403) ; v1(112.555,68.103) 112.555,68.505 113.125,69.075 DD1.1
NetDD1_2: DD1.2 DD2.2 FU1.2 R47.1 | length 103.7
  Top Layer w0.3: v1(53.55,59.775) 53.575,59.8 v1(53.575,61.425) ; v1@53.625,61.475 R47.1 ; v1(59.95,61.475) 60.325,61.1 87.95,61.1 89.05,60 92.525,60 93.45,60.925 109.775,60.925 110.675,61.825 v1(110.675,62.1) ; v1(111.93,68.953) 111.93,68.855 111.725,68.65 111.725,65.5 v1(113.775,63.45)
  Bottom Layer w0.3: FU1.2 v1(53.55,59.775) ; v1(53.575,61.425) 53.636,61.486 63.839,61.486 66.228,63.875 72.572,63.875 73.264,63.183 75.775,63.183 77.225,64.633 77.225,68.45 78.6,69.825 DD2.2 ; v1(110.675,62.1) 111.4,62.825 113.15,62.825 v1(113.775,63.45) ; v1(111.93,68.953) 112.802,69.825 DD1.2
NetDD1_3: DD1.3 DD2.3 | length 51.7
  Top Layer w0.3: v1(77.975,70.4) 95.85,70.4 98,68.25 v1(98,68.15) ; v1(115.025,64.325) 115.025,65.3 116.75,67.025 v1(116.75,70.6)
  Bottom Layer w0.3: v1(77.975,70.4) 78.15,70.575 DD2.3 ; v1(98,68.15) 98,67.612 100.687,64.925 107.844,64.925 108.419,64.35 115,64.35 v1(115.025,64.325) ; DD1.3 116.725,70.575 v1(116.75,70.6)
NetDD1_4: DD1.4 DD2.4 | length 53.6
  Top Layer w0.3: v1(77.479,71.203) 96.547,71.203 99.325,68.425 v1(99.325,68.25) ; v1(114.25,65.175) 114.25,65.374 115.926,67.049 115.926,70.124 115.6,70.45 115.6,71.075 116.075,71.55 v1(116.725,71.55)
  Bottom Layer w0.3: v1(77.479,71.203) 77.6,71.325 DD2.4 ; v1(99.325,68.25) 99.325,67.135 100.935,65.525 108.093,65.525 108.668,64.95 114.025,64.95 v1(114.25,65.175) ; DD1.4 116,71.325 116.225,71.55 v1(116.725,71.55)
NetDD1_6: DD1.6 R49.2 | length 3
  Bottom Layer w0.3: R49.2 DD1.6
NetDD2_6: DD2.6 R50.2 | length 3.6
  Bottom Layer w0.3: R50.2 78.374,73.551 79.1,72.825 DD2.6
NetFU1_1: FU1.1 XP1.2 XP4.2 | length 136.6
  Top Layer w0.3: XP1.2 48.55,46.45 53.901,46.45 55.876,44.475 111,44.475 v1(117.125,50.6)
  Bottom Layer w0.3: v1(117.125,50.6) 118.225,51.7 150.625,51.7 152.625,49.7 XP4.2
  Bottom Layer w0.5: XP1.2 46.85,51.25 51,51.25 53.55,53.8 FU1.1
NetFU2_1: FU2.1 XP1.3 XP4.3 | length 144.6
  Top Layer w1: v2(57.65,46.025) 108.15,46.025 v1(112.05,49.925)
  Bottom Layer w1: FU2.1 37.95,50.9 39.15,49.7 XP1.3 42.3,43.875 43.75,42.425 50.55,42.425 54.15,46.025 v2(57.65,46.025) ; v1(112.05,49.925) 115.95,53.825 158.5,53.825 159.625,54.95 165.45,54.95 XP4.3
NetFU2_2: FU2.2 VD31.1 | length 4.5
  Bottom Layer w0.75: FU2.2@37.938,55.863 FU2.2
  Bottom Layer w1: VD31.1 37.926,55.899 FU2.2
NetFU3_1: FU3.1 XP1.4 XP4.4 | length 126.1
  Top Layer w0.3: XP1.4 48.5,52.7 56.125,45.075 109.95,45.075 v1(115.375,50.5)
  Bottom Layer w0.3: v1(115.375,50.5) 117.425,52.55 151.05,52.55 152.275,51.325 160.925,51.325 162.3,52.7 XP4.4
  Bottom Layer w0.5: XP1.4 FU3.1
NetR1_1: R1.1 VD1.1 | length 11.6
  Top Layer w0.75: VD1.1 49,94.8 50.125,95.925 R1.1
NetR2_1: R2.1 VD2.1 | length 5.6
  Top Layer w0.75: VD2.1 61.5,96.65 62.15,97.3 R2.1
NetR3_1: R3.1 VD3.1 | length 2.6
  Top Layer w0.75: R3.1 80.1,94.775 VD3.1
NetR4_1: R4.1 VD4.1 | length 4.5
  Top Layer w0.75: R4.1 95.05,96.45 95.65,95.85 96.55,95.85 97.025,95.375 VD4.1
NetR5_1: R5.1 VD5.1 | length 5.8
  Top Layer w0.75: VD5.1 109.425,94.1 110.1,94.775 R5.1
NetR6_1: R6.1 VD6.1 | length 5.8
  Top Layer w0.75: R6.1 125.1,95.4 126.325,94.175 VD6.1
NetR7_1: R7.1 VD7.1 | length 5.6
  Top Layer w0.75: R7.1 140.05,94.225 140.9,93.375 VD7.1
NetR8_1: R8.1 VD8.1 | length 5.5
  Top Layer w0.75: R8.1 155.075,93.975 155.85,93.2 VD8.1
NetR9_1: R9.1 VD9.1 | length 4.9
  Top Layer w0.75: VD9.1 39.3,64.7 39.875,64.125 R9.1
NetR10_1: R10.1 VD10.1 | length 4.2
  Top Layer w0.75: R10.1 56.875,64.7 58.6,66.425 VD10.1
NetR11_1: R11.1 VD32.1 | length 2.5
  Top Layer w0.75: R11.1 71.875,66.6 VD32.1
NetR12_1: R12.1 VD33.1 | length 3.1
  Top Layer w0.75: R12.1 VD33.1
NetR13_1: R13.1 VD34.1 | length 5.6
  Top Layer w0.75: R13.1 103.7,64.125 105.35,65.775 VD34.1
NetR14_1: R14.1 VD35.1 | length 4.6
  Top Layer w0.75: R14.1 116.95,65.75 117.575,66.375 VD35.1
NetR15_1: R15.1 VD36.1 | length 4.5
  Top Layer w0.75: R15.1 133.125,64.125 133.675,64.675 VD36.1
NetR16_1: R16.1 VD37.1 | length 3
  Top Layer w0.7: R16.1 VD37.1
NetR17_1: R17.1 VD38.1 | length 2.7
  Top Layer w0.75: VD38.1 162,64.15 R17.1
NetVD1_2: VD1.2 VD11.1 | length 5.5
  Top Layer w0.75: VD1.2 43.75,92.45 44.375,91.825 VD11.1
NetVD2_2: VD2.2 VD12.1 | length 6.5
  Top Layer w0.75: VD2.2 64.1,92.525 65.575,91.05 VD12.1
NetVD3_2: VD3.2 VD13.1 | length 5.6
  Top Layer w0.75: VD3.2 83.95,92.4 84.35,92 VD13.1 VD13.1@84.5,91.2
NetVD4_2: VD4.2 VD14.1 | length 4.8
  Top Layer w0.75: VD4.2 100.25,91.75 100.825,91.175 VD14.1
NetVD5_2: VD5.2 VD15.1 | length 5.9
  Top Layer w0.75: VD5.2 114.6,91.75 115.675,90.675 VD15.1
NetVD6_2: VD6.2 VD16.1 | length 6.8
  Top Layer w0.75: VD6.2 131.025,91.825 132.45,90.4 VD16.1
NetVD7_2: VD7.2 VD17.1 | length 7.5
  Top Layer w0.75: VD7.2 146.7,93.375 147.75,92.325 VD17.1
NetVD8_2: VD8.2 VD18.1 | length 6.6
  Top Layer w0.75: VD8.2 163,93.2 164.3,91.9 VD18.1
NetVD9_2: VD9.2 VD19.1 | length 4.2
  Top Layer w0.75: VD19.1 39.25,69.15 VD9.2
NetVD10_2: VD10.2 VD20.1 | length 4.9
  Top Layer w0.75: VD10.2 61.25,69.95 61.975,70.675 VD20.1
NetVD11_2: VD11.2 VD21.1 | length 5.3
  Top Layer w0.75: VD11.2 47.75,88.2 48.35,87.6 VD21.1
NetVD12_2: VD12.2 VD22.1 | length 6.2
  Top Layer w0.75: VD12.2 65.575,83.225 66.125,82.675 VD22.1
NetVD13_2: VD13.2 VD23.1 | length 3.8
  Top Layer w0.75: VD13.2 84.35,87.2 85.225,86.325 VD23.1
NetVD14_2: VD14.2 VD24.1 | length 5.5
  Top Layer w0.75: VD14.2 103.7,88.05 104.625,87.125 VD24.1
NetVD15_2: VD15.2 VD25.1 | length 19.5
  Top Layer w0.75: VD25.1 117.1,82.95 118.975,81.075 121.7,81.075 123.3,82.675 123.3,86.825 121.05,89.075 VD15.2
NetVD16_2: VD16.2 VD26.1 | length 5.6
  Top Layer w0.75: VD16.2 132.5,85.725 134.25,85.725 134.875,85.1 VD26.1
NetVD17_2: VD17.2 VD27.1 | length 3.8
  Top Layer w0.75: VD27.1 147.725,86.05 VD17.2
NetVD18_2: VD18.2 VD28.1 | length 6.5
  Top Layer w0.75: VD28.1 162.45,84.025 164.3,85.875 VD18.2
NetVD19_2: VD19.2 VD29.1 | length 7.1
  Top Layer w0.75: VD19.2 43.9,73.3 45.5,74.9 VD29.1
NetVD20_2: VD20.2 VD30.1 | length 6.6
  Top Layer w0.75: VD20.2 66.15,71.9 67.85,73.6 VD30.1
NetVD32_2: VD32.2 VD39.1 | length 22.5
  Top Layer w0.75: VD32.2 71.925,77.1 73.325,78.5 79.65,78.5 80.025,78.125 80.025,74.525 80.575,73.975 VD39.1
NetVD33_2: VD33.2 VD40.1 | length 31.6
  Top Layer w0.5: VD33.2 101.375,67.25 102.775,68.65 102.775,71.825 101.65,72.95 93.4,72.95 92.625,73.725 VD40.1
NetVD34_2: VD34.2 VD41.1 | length 5.7
  Top Layer w1: VD41.1 105.35,75.2 VD34.2
NetVD35_2: VD35.2 VD42.1 | length 5.1
  Top Layer w0.75: VD35.2 121.7,68.725 122.525,69.55 VD42.1
NetVD36_2: VD36.2 VD43.1 | length 6.9
  Top Layer w0.75: VD36.2 133.675,72.45 134.475,73.25 VD43.1
NetVD37_2: VD37.2 VD44.1 | length 4.5
  Top Layer w0.75: VD37.2 147,71.25 148.175,72.425 VD44.1
NetVD38_2: VD38.2 VD45.1 | length 4.1
  Top Layer w0.75: VD38.2 VD45.1
NetVD39_2: VD39.2 VD46.1 | length 6.5
  Top Layer w0.75: VD46.1 80.675,80.7 81.775,79.6 VD39.2
NetVD40_2: VD40.2 VD47.1 | length 5.8
  Top Layer w0.5: VD40.2 89.25,77.675 90.125,78.55 VD47.1
NetVD41_2: VD41.2 VD48.1 | length 4.8
  Top Layer w0.5: VD41.2 102.975,78.125 103.675,78.825 VD48.1
NetVD42_2: VD42.2 VD49.1 | length 6.6
  Top Layer w0.75: VD42.2 124.475,74.3 126.225,76.05 VD49.1
NetVD43_2: VD43.2 VD50.1 | length 7.5
  Top Layer w0.75: VD43.2 137.4,77.225 137.85,77.675 VD50.1
NetVD44_2: VD44.2 VD51.1 | length 6.3
  Top Layer w0.75: VD44.2 151.925,73.475 153.25,74.8 VD51.1
NetVD45_2: VD45.2 VD52.1 | length 4.1
  Top Layer w0.75: VD45.2 VD52.1
NetXP2_1: XP2.1 XP3.1 | length 27
  Bottom Layer w0.3: XP3.1 117.6,47.725 120.475,50.6 131.425,50.6 135.525,46.5 XP2.1
NetXP2_2: XP2.2 XP3.2 | length 23.9
  Top Layer w0.3: XP3.2 118.815,45.175 139.285,45.175 XP2.2
NetXP2_3: XP2.3 XP3.3 | length 25.4
  Top Layer w0.3: XP3.3 v1(122.074,48.434) ; v1(130.181,47.827) 130.284,47.725 132.875,47.725 133.6,48.45 141.65,48.45 143.04,47.06 XP2.3
  Bottom Layer w0.3: v1(122.074,48.434) 129.574,48.434 v1(130.181,47.827)
NetXP2_4: XP2.4 XP3.4 | length 23.9
  Bottom Layer w0.3: XP3.4 121.405,45.225 141.775,45.225 XP2.4
NetXP2_5: XP2.5 XP3.5 | length 26.3
  Top Layer w0.3: XP3.5 v1(125.38,49.2) ; v1(131.381,48.952) 131.479,49.05 144.85,49.05 145.58,48.32 XP2.5
  Bottom Layer w0.3: v1(125.38,49.2) 131.134,49.2 v1(131.381,48.952)
NetXP2_6: XP2.6 XP3.6 | length 24.4
  Bottom Layer w0.3: XP3.6 124.44,42.2 143.82,42.2 XP2.6
NetXP2_7: XP2.7 XP3.7 | length 27.8
  Top Layer w0.3: XP3.7 129.045,50.325 146.705,50.325 v1(146.857,50.477)
  Bottom Layer w0.3: v1(146.857,50.477) 146.88,50.5 148.12,49.26 XP2.7
NetXP2_8: XP2.8 XP3.8 | length 24.3
  Top Layer w0.3: XP3.8 126.93,42.25 146.41,42.25 XP2.8
NetXP2_9: XP2.9 XP3.9 | length 26.5
  Top Layer w0.3: XP3.9 130.985,49.725 148.975,49.725 150.66,48.04 XP2.9
pads on no net: DD1.14 DD1.15 DD1.16 DD1.24 DD1.25 DD1.26 DD1.27 DD1.28 DD1.29 DD1.30 DD1.31 DD1.32 DD1.33 DD1.34 DD1.35 DD1.36 DD1.37 DD1.38 DD1.39 DD1.40 DD1.41 DD1.42 DD1.43 DD1.44 DD1.45 DD1.46 DD1.47 DD1.48 DD1.49 DD1.50 DD1.51 DD1.52 DD1.53 DD1.54 DD1.55 DD1.56 DD2.14 DD2.15 DD2.16 Designator38.1 Designator38.2 IND1.12 IND1.13 IND1.14 IND1.15 IND1.17 IND1.21 IND1.22 IND1.23 IND1.25 IND1.29 IND1.30 IND1.45 IND1.47 IND1.48 IND1.49 IND1.53 IND1.54 IND1.56 IND1.57 XP1.7 XP4.5

## Polygon pours and split planes (outlines as drawn)
GND on Top Layer "GND_L01_P004" (hatched 90Degree grid 0.15 track 0.2, remove dead copper, pour order 4): 16.9,120.4 189.4,120.4 189.4,40.5 16.9,40.5
GND on Bottom Layer "GND_L02_P006" (hatched 90Degree grid 0.15 track 0.2, remove dead copper, pour order 6): 16.9,120.4 189.4,120.4 189.4,40.5 16.9,40.5

## Keep-outs
Keep-Out Layer:
  the board outline again, w0.2

## Other copper
Bottom Layer:
  pour cut-out: 36.662,55.025 39.287,55.025 39.287,53.525 36.662,53.525
  pour cut-out: 46.963,57.475 49.588,57.475 49.588,55.975 46.963,55.975
  pour cut-out: 52.237,57.45 54.862,57.45 54.862,55.95 52.237,55.95

## Silkscreen, mask and mechanical layers (free items; w line width, h text height)
Top Overlay:
  text "LCD 7-SEGMENT I2C BOARD" at 61.25,44.4 h2
Bottom Overlay:
  text "LCD 20X4" at 173.25,54.55 h2
  text "KEYBOARD" at 141.675,50.7 h2
Mechanical 1:
  text "Добавить подогрев платы" at 81.15,126.55 h4

## Text inside footprints (layer, text, board x,y; h text height)
Designator38: Top Overlay "10W" at 179.925,85.85 h4 r270
IND1: Top Overlay "70" at 58.075,104.05 h1; Top Overlay "36" at 149.2,104.05 h1; Top Overlay "35" at 149.275,55.825 h1; Top Overlay "1" at 59.375,55.875 h1